# EAGLE board VIN (EAGLE 7.6.0)

Size 73.58 x 355.49 mm. Coordinates in mm from the lower left corner, seen from the top.
Outline: 0,0 56.82,0 56.82,53.33 0,53.33 0,0
Copper layers (1*16): Top 0.035mm / dielectric 1.5mm / Bottom 0.035mm
Design rules "default": minimum track width 10mil, minimum drill 24mil, track to track 8mil, track to pad 8mil, pad to pad 8mil, via to via 8mil, smd to smd 8mil, copper to edge 40mil, drill to drill 8mil, minimum pad ring 10mil, minimum via ring 8mil, stop-mask expansion 4mil, vias tented up to drill 0mil, thermal gap 10mil

## Footprints (pad centres in the part's own frame; a part is rotated, then mirrored left to right if it is on the bottom)
LED5MM = drill 0.813 octagon: A -1.27,0; K 1.27,0
PIEZO-22MM = drill 1 pad 2.54: P$1 -5,0; P$2 5,0
0207/10 = drill 0.813 octagon: 1 -5.08,0; 2 5.08,0
B25V = drill 0.813 long: A 2.54,0.635; E -2.54,0.635; S 0,0.635
TL1105 = drill 1 pad 1.676: 1 -2.25,3.25; 2 2.25,3.25; 3 -2.25,-3.25; 4 2.25,-3.25
ARDUINO_UNO = drill 1.016 pad 1.88: 0 63.5,50.8; 1 60.96,50.8; 2 58.42,50.8; 3 55.88,50.8; 3.3V 35.56,2.54; 4 53.34,50.8; 5 50.8,50.8; 5V 38.1,2.54; 6 48.26,50.8; 7 45.72,50.8; 8 41.656,50.8; 9 39.116,50.8; 10 36.576,50.8; 11 34.036,50.8; 12 31.496,50.8; 13 28.956,50.8; A0 50.8,2.54; A1 53.34,2.54; A2 55.88,2.54; A3 58.42,2.54; A4 60.96,2.54; A5 63.5,2.54; AREF 23.876,50.8; GND 26.416,50.8; GND. 43.18,2.54; GND.. 40.64,2.54; I/OREF 30.48,2.54; N/C 27.94,2.54; RESET 33.02,2.54; SCL 18.796,50.8; SDA 21.336,50.8; VIN 45.72,2.54 | hole 3.2: 66.04,7.62; 66.04,35.56; 15.24,50.8; 13.97,2.54
1X16P-2.54-2.54-11.6-3.0-BLACK-MALE = drill 0.889 pad 1.651 square: 1 0,19.05 | drill 0.889 pad 1.651: 2 0,16.51; 3 0,13.97; 4 0,11.43; 5 0,8.89; 6 0,6.35; 7 0,3.81; 8 0,1.27; 9 0,-1.27; 10 0,-3.81; 11 0,-6.35; 12 0,-8.89; 13 0,-11.43; 14 0,-13.97; 15 0,-16.51; 16 0,-19.05

## Placement (x,y rotation side)
D1  [LED5MM]  5,276.78 0 top
D2  [LED5MM]  5,340.28 0 top
D3  [LED5MM]  5,352.98 0 top
D4  [LED5MM]  5,365.68 0 top  (outside the outline)
D5  [LED5MM]  5,378.38 0 top  (outside the outline)
D6  [LED5MM]  5,391.08 0 top  (outside the outline)
D7  [LED5MM]  5,403.78 0 top  (outside the outline)
D8  [LED5MM]  5,416.48 0 top  (outside the outline)
D9  [LED5MM]  5,429.18 0 top  (outside the outline)
PIEZO1  [PIEZO-22MM]  5,225.98 0 top
R1  1k‎Ω  [0207/10]  5,264.08 0 top
R2  1k‎Ω  [0207/10]  5,289.48 0 top
R3  2000‎Ω  [0207/10]  5,124.38 0 top
R4  200‎Ω  [0207/10]  5,137.08 0 top
R5  400‎Ω  [0207/10]  5,149.78 0 top
R6  800‎Ω  [0207/10]  5,162.48 0 top
R7  1600‎Ω  [0207/10]  5,175.18 0 top
R8  3200‎Ω  [0207/10]  5,187.88 0 top
R9  6400‎Ω  [0207/10]  5,200.58 0 top
R10  12800‎Ω  [0207/10]  5,213.28 0 top
R11  1k‎Ω  [0207/10]  5,327.58 0 top
R12  1k‎Ω  [0207/10]  5,441.88 0 top  (outside the outline)
R13  1k‎Ω  [0207/10]  5,454.58 0 top  (outside the outline)
R14  1k‎Ω  [0207/10]  5,467.28 0 top  (outside the outline)
R15  1k‎Ω  [0207/10]  5,479.98 0 top  (outside the outline)
R16  1k‎Ω  [0207/10]  5,492.68 0 top  (outside the outline)
R17  1k‎Ω  [0207/10]  5,505.38 0 top  (outside the outline)
R18  1k‎Ω  [0207/10]  5,518.08 0 top  (outside the outline)
R19  1k‎Ω  [0207/10]  5,530.78 0 top  (outside the outline)
Rpot1  5k‎Ω  [B25V]  5,238.68 0 top
S1  [TL1105]  5,22.78 0 top
S2  [TL1105]  5,35.48 0 top
S3  [TL1105]  5,48.18 0 top
S4  [TL1105]  5,60.88 0 top
S5  [TL1105]  5,73.58 0 top
S6  [TL1105]  5,86.28 0 top
S7  [TL1105]  5,98.98 0 top
S8  [TL1105]  5,111.68 0 top
S9  [TL1105]  5,251.38 0 top
U1  [ARDUINO_UNO]  5,10.08 0 top
U2  [ARDUINO_UNO]  5,302.18 0 top
U3  [1X16P-2.54-2.54-11.6-3.0-BLACK-MALE]  5,314.88 0 top

## Library data of the parts
D1-D9 PIEZO1 R1-R19 Rpot1 S1-S9 U1-U3 = AUTODESK_CIRCUITS_BREADBOARD

## Nets
N$1: S1.4 S2.4 S3.4 S4.4 S5.4 S6.4 S7.4 S8.4
N$2: S1.1
N$3: R3.2 R4.1 S1.3 U1.A0
N$4: S2.1
N$5: R4.2 R5.1 S2.3
N$6: S3.1
N$7: R5.2 R6.1 S3.3
N$8: S4.1
N$9: R6.2 R7.1 S4.3
N$10: S5.1
N$11: R7.2 R8.1 S5.3
N$12: S6.1
N$13: R8.2 R9.1 S6.3
N$14: S7.1
N$15: R9.2 R10.1 S7.3
N$16: S8.1
N$17: R10.2 S8.3
N$18: PIEZO1.P$2 Rpot1.A
N$19: S9.4
N$20: S9.1 U1.3
N$21: R1.2 S9.3
N$22: PIEZO1.P$1 U1.2
N$23: D1.K R2.2
N$24: D1.A U1.4
N$25: U2.12 U3.4
N$26: D2.K D3.K D4.K D5.K D6.K D7.K D8.K D9.K R1.1 R2.1 Rpot1.S S1.2 S2.2 S3.2 S4.2 S5.2 S6.2 S7.2 S8.2 U1.GND.. U2.GND. U3.1 U3.3 U3.5
N$27: U2.11 U3.6
N$28: U3.9
N$29: U3.10
N$30: U2.5 U3.11
N$31: U2.4 U3.12
N$32: U2.3 U3.13
N$33: R3.1 R11.2 S9.2 U1.5V U3.2 U3.15
N$34: R11.1 U3.16
N$35: U3.7
N$36: U3.8
N$37: U2.2 U3.14
N$38: U1.A4 U2.A4
N$39: U1.A5 U2.A5
N$40: D2.A R12.1
N$41: D3.A R13.1
N$42: D4.A R14.1
N$43: D5.A R15.1
N$44: D6.A R16.1
N$45: D7.A R17.1
N$46: D8.A R18.1
N$47: D9.A R19.1
N$48: R12.2 U1.5
N$49: R13.2 U1.6
N$50: R14.2 U1.7
N$51: R15.2 U1.8
N$52: R16.2 U1.9
N$53: R17.2 U1.10
N$54: R18.2 U1.11
N$55: R19.2 U1.12

## Tracks (layer width: path | path; a pad name or v marks a point on that pad's centre or on a via)
N$1  (7 unrouted)
N$3  (3 unrouted)
N$5  (2 unrouted)
N$7  (2 unrouted)
N$9  (2 unrouted)
N$11  (2 unrouted)
N$13  (2 unrouted)
N$15  (2 unrouted)
N$17  (1 unrouted)
N$18  (1 unrouted)
N$20  (1 unrouted)
N$21  (1 unrouted)
N$22  (1 unrouted)
N$23  (1 unrouted)
N$24  (1 unrouted)
N$25  (1 unrouted)
N$26  (23 unrouted)
N$27  (1 unrouted)
N$30  (1 unrouted)
N$31  (1 unrouted)
N$32  (1 unrouted)
N$33  (5 unrouted)
N$34  (1 unrouted)
N$37  (1 unrouted)
N$38  (1 unrouted)
N$39  (1 unrouted)
N$40  (1 unrouted)
N$41  (1 unrouted)
N$42  (1 unrouted)
N$43  (1 unrouted)
N$44  (1 unrouted)
N$45  (1 unrouted)
N$46  (1 unrouted)
N$47  (1 unrouted)
N$48  (1 unrouted)
N$49  (1 unrouted)
N$50  (1 unrouted)
N$51  (1 unrouted)
N$52  (1 unrouted)
N$53  (1 unrouted)
N$54  (1 unrouted)
N$55  (1 unrouted)